# EAGLE board parcialinfo2(1) (EAGLE 7.6.0)

Size 73.58 x 63.39 mm. Coordinates in mm from the lower left corner, seen from the top.
Outline: 0,0 56.82,0 56.82,53.33 0,53.33 0,0
Copper layers (1*16): Top 0.035mm / dielectric 1.5mm / Bottom 0.035mm
Design rules "default": minimum track width 10mil, minimum drill 24mil, track to track 8mil, track to pad 8mil, pad to pad 8mil, via to via 8mil, smd to smd 8mil, copper to edge 40mil, drill to drill 8mil, minimum pad ring 10mil, minimum via ring 8mil, stop-mask expansion 4mil, vias tented up to drill 0mil, thermal gap 10mil

## Footprints (pad centres in the part's own frame; a part is rotated, then mirrored left to right if it is on the bottom)
LED5MM = drill 0.813 octagon: A -1.27,0; K 1.27,0
0207/10 = drill 0.813 octagon: 1 -5.08,0; 2 5.08,0
ARDUINO_UNO = drill 1.016 pad 1.88: 0 63.5,50.8; 1 60.96,50.8; 2 58.42,50.8; 3 55.88,50.8; 3.3V 35.56,2.54; 4 53.34,50.8; 5 50.8,50.8; 5V 38.1,2.54; 6 48.26,50.8; 7 45.72,50.8; 8 41.656,50.8; 9 39.116,50.8; 10 36.576,50.8; 11 34.036,50.8; 12 31.496,50.8; 13 28.956,50.8; A0 50.8,2.54; A1 53.34,2.54; A2 55.88,2.54; A3 58.42,2.54; A4 60.96,2.54; A5 63.5,2.54; AREF 23.876,50.8; GND 26.416,50.8; GND. 43.18,2.54; GND.. 40.64,2.54; I/OREF 30.48,2.54; N/C 27.94,2.54; RESET 33.02,2.54; SCL 18.796,50.8; SDA 21.336,50.8; VIN 45.72,2.54 | hole 3.2: 66.04,7.62; 66.04,35.56; 15.24,50.8; 13.97,2.54
DIL16 = drill 0.813 long: 1 -8.89,-3.81; 2 -6.35,-3.81; 3 -3.81,-3.81; 4 -1.27,-3.81; 5 1.27,-3.81; 6 3.81,-3.81; 7 6.35,-3.81; 8 8.89,-3.81; 9 8.89,3.81; 10 6.35,3.81; 11 3.81,3.81; 12 1.27,3.81; 13 -1.27,3.81; 14 -3.81,3.81; 15 -6.35,3.81; 16 -8.89,3.81

## Placement (x,y rotation side)
D5  [LED5MM]  5,124.38 0 top  (outside the outline)
D6  [LED5MM]  5,137.08 0 top  (outside the outline)
D7  [LED5MM]  5,149.78 0 top  (outside the outline)
D8  [LED5MM]  5,162.48 0 top  (outside the outline)
D9  [LED5MM]  5,175.18 0 top  (outside the outline)
D10  [LED5MM]  5,187.88 0 top  (outside the outline)
D11  [LED5MM]  5,200.58 0 top  (outside the outline)
D12  [LED5MM]  5,213.28 0 top  (outside the outline)
D13  [LED5MM]  5,225.98 0 top  (outside the outline)
D14  [LED5MM]  5,238.68 0 top  (outside the outline)
D15  [LED5MM]  5,251.38 0 top  (outside the outline)
D16  [LED5MM]  5,264.08 0 top  (outside the outline)
D17  [LED5MM]  5,276.78 0 top  (outside the outline)
D18  [LED5MM]  5,289.48 0 top  (outside the outline)
D19  [LED5MM]  5,302.18 0 top  (outside the outline)
D20  [LED5MM]  5,314.88 0 top  (outside the outline)
D21  [LED5MM]  5,327.58 0 top  (outside the outline)
D22  [LED5MM]  5,340.28 0 top  (outside the outline)
D23  [LED5MM]  5,352.98 0 top  (outside the outline)
D24  [LED5MM]  5,365.68 0 top  (outside the outline)
D25  [LED5MM]  5,378.38 0 top  (outside the outline)
D26  [LED5MM]  5,391.08 0 top  (outside the outline)
D27  [LED5MM]  5,403.78 0 top  (outside the outline)
D28  [LED5MM]  5,416.48 0 top  (outside the outline)
D29  [LED5MM]  5,429.18 0 top  (outside the outline)
D30  [LED5MM]  5,441.88 0 top  (outside the outline)
D31  [LED5MM]  5,454.58 0 top  (outside the outline)
D32  [LED5MM]  5,467.28 0 top  (outside the outline)
D33  [LED5MM]  5,479.98 0 top  (outside the outline)
D34  [LED5MM]  5,492.68 0 top  (outside the outline)
D35  [LED5MM]  5,505.38 0 top  (outside the outline)
D36  [LED5MM]  5,518.08 0 top  (outside the outline)
D37  [LED5MM]  5,530.78 0 top  (outside the outline)
D38  [LED5MM]  5,543.48 0 top  (outside the outline)
D39  [LED5MM]  5,556.18 0 top  (outside the outline)
D40  [LED5MM]  5,568.88 0 top  (outside the outline)
D41  [LED5MM]  5,581.58 0 top  (outside the outline)
D42  [LED5MM]  5,848.28 0 top  (outside the outline)
D43  [LED5MM]  5,594.28 0 top  (outside the outline)
D44  [LED5MM]  5,606.98 0 top  (outside the outline)
D45  [LED5MM]  5,619.68 0 top  (outside the outline)
D46  [LED5MM]  5,632.38 0 top  (outside the outline)
D47  [LED5MM]  5,645.08 0 top  (outside the outline)
D48  [LED5MM]  5,657.78 0 top  (outside the outline)
D49  [LED5MM]  5,670.48 0 top  (outside the outline)
D50  [LED5MM]  5,683.18 0 top  (outside the outline)
D51  [LED5MM]  5,695.88 0 top  (outside the outline)
D52  [LED5MM]  5,708.58 0 top  (outside the outline)
D53  [LED5MM]  5,721.28 0 top  (outside the outline)
D54  [LED5MM]  5,733.98 0 top  (outside the outline)
D55  [LED5MM]  5,746.68 0 top  (outside the outline)
D56  [LED5MM]  5,759.38 0 top  (outside the outline)
D57  [LED5MM]  5,772.08 0 top  (outside the outline)
D58  [LED5MM]  5,784.78 0 top  (outside the outline)
D59  [LED5MM]  5,797.48 0 top  (outside the outline)
D60  [LED5MM]  5,810.18 0 top  (outside the outline)
D61  [LED5MM]  5,822.88 0 top  (outside the outline)
D62  [LED5MM]  5,860.98 0 top  (outside the outline)
D63  [LED5MM]  5,873.68 0 top  (outside the outline)
D64  [LED5MM]  5,886.38 0 top  (outside the outline)
D65  [LED5MM]  5,835.58 0 top  (outside the outline)
D66  [LED5MM]  5,899.08 0 top  (outside the outline)
D67  [LED5MM]  5,911.78 0 top  (outside the outline)
D68  [LED5MM]  5,924.48 0 top  (outside the outline)
R1  560‎Ω  [0207/10]  5,937.18 0 top  (outside the outline)
R3  560‎Ω  [0207/10]  5,949.88 0 top  (outside the outline)
R4  560‎Ω  [0207/10]  5,962.58 0 top  (outside the outline)
R5  560‎Ω  [0207/10]  5,975.28 0 top  (outside the outline)
R6  560‎Ω  [0207/10]  5,987.98 0 top  (outside the outline)
R7  560‎Ω  [0207/10]  5,1000.68 0 top  (outside the outline)
R8  560‎Ω  [0207/10]  5,1013.38 0 top  (outside the outline)
R9  560‎Ω  [0207/10]  5,1026.08 0 top  (outside the outline)
R10  560‎Ω  [0207/10]  5,1038.78 0 top  (outside the outline)
R11  560‎Ω  [0207/10]  5,1051.48 0 top  (outside the outline)
R12  560‎Ω  [0207/10]  5,1064.18 0 top  (outside the outline)
R13  560‎Ω  [0207/10]  5,1076.88 0 top  (outside the outline)
R14  560‎Ω  [0207/10]  5,1089.58 0 top  (outside the outline)
R15  560‎Ω  [0207/10]  5,1102.28 0 top  (outside the outline)
R16  560‎Ω  [0207/10]  5,1114.98 0 top  (outside the outline)
R17  560‎Ω  [0207/10]  5,1127.68 0 top  (outside the outline)
R18  560‎Ω  [0207/10]  5,1140.38 0 top  (outside the outline)
R19  560‎Ω  [0207/10]  5,1153.08 0 top  (outside the outline)
R20  560‎Ω  [0207/10]  5,1165.78 0 top  (outside the outline)
R21  560‎Ω  [0207/10]  5,1178.48 0 top  (outside the outline)
R22  560‎Ω  [0207/10]  5,1191.18 0 top  (outside the outline)
R23  560‎Ω  [0207/10]  5,1203.88 0 top  (outside the outline)
R24  560‎Ω  [0207/10]  5,1216.58 0 top  (outside the outline)
R25  560‎Ω  [0207/10]  5,1229.28 0 top  (outside the outline)
R26  560‎Ω  [0207/10]  5,1241.98 0 top  (outside the outline)
R27  560‎Ω  [0207/10]  5,1254.68 0 top  (outside the outline)
R28  560‎Ω  [0207/10]  5,1267.38 0 top  (outside the outline)
R29  560‎Ω  [0207/10]  5,1280.08 0 top  (outside the outline)
R30  560‎Ω  [0207/10]  5,1292.78 0 top  (outside the outline)
R31  560‎Ω  [0207/10]  5,1305.48 0 top  (outside the outline)
R32  560‎Ω  [0207/10]  5,1318.18 0 top  (outside the outline)
R33  560‎Ω  [0207/10]  5,1330.88 0 top  (outside the outline)
R34  560‎Ω  [0207/10]  5,1343.58 0 top  (outside the outline)
R35  560‎Ω  [0207/10]  5,1356.28 0 top  (outside the outline)
R36  560‎Ω  [0207/10]  5,1368.98 0 top  (outside the outline)
R37  560‎Ω  [0207/10]  5,1381.68 0 top  (outside the outline)
R38  560‎Ω  [0207/10]  5,1394.38 0 top  (outside the outline)
R39  560‎Ω  [0207/10]  5,1407.08 0 top  (outside the outline)
R40  560‎Ω  [0207/10]  5,1419.78 0 top  (outside the outline)
R41  560‎Ω  [0207/10]  5,1432.48 0 top  (outside the outline)
R42  560‎Ω  [0207/10]  5,1445.18 0 top  (outside the outline)
R43  560‎Ω  [0207/10]  5,1457.88 0 top  (outside the outline)
R44  560‎Ω  [0207/10]  5,1470.58 0 top  (outside the outline)
R45  560‎Ω  [0207/10]  5,1483.28 0 top  (outside the outline)
R46  560‎Ω  [0207/10]  5,1495.98 0 top  (outside the outline)
R47  560‎Ω  [0207/10]  5,1508.68 0 top  (outside the outline)
R48  560‎Ω  [0207/10]  5,1521.38 0 top  (outside the outline)
R49  560‎Ω  [0207/10]  5,1534.08 0 top  (outside the outline)
R50  560‎Ω  [0207/10]  5,1546.78 0 top  (outside the outline)
R51  560‎Ω  [0207/10]  5,1559.48 0 top  (outside the outline)
R52  560‎Ω  [0207/10]  5,1572.18 0 top  (outside the outline)
R53  560‎Ω  [0207/10]  5,1584.88 0 top  (outside the outline)
R54  560‎Ω  [0207/10]  5,1597.58 0 top  (outside the outline)
R55  560‎Ω  [0207/10]  5,1610.28 0 top  (outside the outline)
R56  560‎Ω  [0207/10]  5,1622.98 0 top  (outside the outline)
R57  560‎Ω  [0207/10]  5,1635.68 0 top  (outside the outline)
R58  560‎Ω  [0207/10]  5,1648.38 0 top  (outside the outline)
R59  560‎Ω  [0207/10]  5,1661.08 0 top  (outside the outline)
R60  560‎Ω  [0207/10]  5,1673.78 0 top  (outside the outline)
R61  560‎Ω  [0207/10]  5,1686.48 0 top  (outside the outline)
R62  560‎Ω  [0207/10]  5,1699.18 0 top  (outside the outline)
R63  560‎Ω  [0207/10]  5,1711.88 0 top  (outside the outline)
R64  560‎Ω  [0207/10]  5,1724.58 0 top  (outside the outline)
R65  560‎Ω  [0207/10]  5,1737.28 0 top  (outside the outline)
U1  [ARDUINO_UNO]  5,10.08 0 top
U2  [DIL16]  5,22.78 0 top
U3  [DIL16]  5,35.48 0 top
U4  [DIL16]  5,48.18 0 top
U5  [DIL16]  5,60.88 0 top
U6  [DIL16]  5,73.58 0 top  (outside the outline)
U7  [DIL16]  5,86.28 0 top  (outside the outline)
U8  [DIL16]  5,98.98 0 top  (outside the outline)
U9  [DIL16]  5,111.68 0 top  (outside the outline)

## Library data of the parts
D5-D68 R1 R3-R65 U1-U9 = AUTODESK_CIRCUITS_BREADBOARD

## Nets
N$1: R8.1 U2.1
N$2: R5.1 U2.4
N$3: R3.1 U2.6
N$4: R1.1 U2.7
N$5: R4.1 U2.5
N$6: U1.2 U2.14
N$7: R58.2 U2.15
N$8: R6.1 U2.3
N$9: U2.9 U3.14
N$10: R15.1 U3.1
N$11: R12.1 U3.4
N$12: R10.1 U3.6
N$13: R9.1 U3.7
N$14: R14.1 U3.2
N$15: R11.1 U3.5
N$16: R59.2 U3.15
N$17: R13.1 U3.3
N$18: U3.9 U4.14
N$19: R22.1 U4.1
N$20: R19.1 U4.4
N$21: R18.1 U4.6
N$22: R16.1 U4.7
N$23: R21.1 U4.2
N$24: R17.1 U4.5
N$25: R60.2 U4.15
N$26: U4.9 U5.14
N$27: R29.1 U5.1
N$28: R26.1 U5.4
N$29: R24.1 U5.6
N$30: R23.1 U5.7
N$31: R28.1 U5.2
N$32: R25.1 U5.5
N$33: R61.2 U5.15
N$34: R27.1 U5.3
N$35: U5.9 U6.14
N$36: R36.1 U6.1
N$37: R34.1 U6.4
N$38: R31.1 U6.6
N$39: R30.1 U6.7
N$40: R35.1 U6.2
N$41: R32.1 U6.5
N$42: R33.1 U6.3
N$43: U6.9 U7.14
N$44: R37.1 U7.1
N$45: R41.1 U7.4
N$46: R42.1 U7.6
N$47: R43.1 U7.7
N$48: R38.1 U7.2
N$49: R40.1 U7.5
N$50: R63.2 U7.15
N$51: R39.1 U7.3
N$52: U7.9 U8.14
N$53: R51.1 U9.1
N$54: R53.1 U9.4
N$55: R56.1 U9.6
N$56: R57.1 U9.7
N$57: R52.1 U9.2
N$58: U1.3 U2.12 U3.12 U4.12 U5.12 U6.12 U7.12 U8.12 U9.12
N$59: R55.1 U9.5
N$60: R65.2 U9.15
N$61: R54.1 U9.3
N$62: U9.9
N$63: U1.4 U2.11 U3.11 U4.11 U5.11 U6.11 U7.11 U8.11 U9.11
N$64: R44.1 U8.1
N$65: R46.1 U8.4
N$66: R48.1 U8.6
N$67: R49.1 U8.7
N$68: R45.1 U8.2
N$69: R47.1 U8.5
N$70: R64.2 U8.15
N$71: R50.1 U8.3
N$72: U8.9 U9.14
N$73: R62.2 U6.15
N$74: U1.5V U2.10 U2.16 U3.10 U3.16 U4.10 U4.16 U5.10 U5.16 U6.10 U6.16 U7.10 U7.16 U8.10 U8.16 U9.10 U9.16
N$75: D20.A R58.1
N$76: D18.A R7.2
N$77: D17.A R6.2
N$78: D16.A R5.2
N$79: D15.A R4.2
N$80: D14.A R3.2
N$81: D13.A R1.2
N$82: D11.A R15.2
N$83: D10.A R14.2
N$84: D9.A R13.2
N$85: D8.A R12.2
N$86: D7.A R11.2
N$87: D6.A R10.2
N$88: D5.A R9.2
N$89: D25.A R20.2
N$90: D26.A R21.2
N$91: D27.A R22.2
N$92: D24.A R19.2
N$93: D23.A R17.2
N$94: D22.A R18.2
N$95: D21.A R16.2
N$96: R7.1 U2.2
N$97: D12.A R59.1
N$98: D28.A R60.1
N$99: D35.A R29.2
N$100: D34.A R28.2
N$101: D33.A R27.2
N$102: D32.A R26.2
N$103: D31.A R25.2
N$104: D30.A R24.2
N$105: D29.A R23.2
N$106: D36.A R61.1
N$107: D44.A R62.1
N$108: D52.A R63.1
N$109: D60.A R64.1
N$110: D68.A R65.1
N$111: D43.A R36.2
N$112: D42.A R35.2
N$113: D41.A R33.2
N$114: D40.A R34.2
N$115: D39.A R32.2
N$116: D38.A R31.2
N$117: D37.A R30.2
N$118: D51.A R37.2
N$119: D50.A R38.2
N$120: D49.A R39.2
N$121: D48.A R41.2
N$122: D47.A R40.2
N$123: D46.A R42.2
N$124: D45.A R43.2
N$125: D59.A R44.2
N$126: D58.A R45.2
N$127: D57.A R50.2
N$128: D56.A R46.2
N$129: D55.A R47.2
N$130: D54.A R48.2
N$131: D53.A R49.2
N$132: D67.A R51.2
N$133: D66.A R52.2
N$134: D65.A R54.2
N$135: D64.A R53.2
N$136: D63.A R55.2
N$137: D62.A R56.2
N$138: D61.A R57.2
N$139: R20.1 U4.3
N$140: D19.A R8.2
N$141: D5.K D6.K D7.K D8.K D9.K D10.K D11.K D12.K D13.K D14.K D15.K D16.K D17.K D18.K D19.K D20.K D21.K D22.K D23.K D24.K D25.K D26.K D27.K D28.K D29.K D30.K D31.K D32.K D33.K D34.K D35.K D36.K D37.K D38.K D39.K D40.K D41.K D42.K D43.K D44.K D45.K D46.K D47.K D48.K D49.K D50.K D51.K D52.K D53.K D54.K D55.K D56.K D57.K D58.K D59.K D60.K D61.K D62.K D63.K D64.K D65.K D66.K D67.K D68.K U1.GND.. U2.8 U2.13 U3.8 U3.13 U4.8 U4.13 U5.8 U5.13 U6.8 U6.13 U7.8 U7.13 U8.8 U8.13 U9.8 U9.13

## Tracks (layer width: path | path; a pad name or v marks a point on that pad's centre or on a via)
N$1  (1 unrouted)
N$2  (1 unrouted)
N$3  (1 unrouted)
N$4  (1 unrouted)
N$5  (1 unrouted)
N$6  (1 unrouted)
N$7  (1 unrouted)
N$8  (1 unrouted)
N$9  (1 unrouted)
N$10  (1 unrouted)
N$11  (1 unrouted)
N$12  (1 unrouted)
N$13  (1 unrouted)
N$14  (1 unrouted)
N$15  (1 unrouted)
N$16  (1 unrouted)
N$17  (1 unrouted)
N$18  (1 unrouted)
N$19  (1 unrouted)
N$20  (1 unrouted)
N$21  (1 unrouted)
N$22  (1 unrouted)
N$23  (1 unrouted)
N$24  (1 unrouted)
N$25  (1 unrouted)
N$26  (1 unrouted)
N$27  (1 unrouted)
N$28  (1 unrouted)
N$29  (1 unrouted)
N$30  (1 unrouted)
N$31  (1 unrouted)
N$32  (1 unrouted)
N$33  (1 unrouted)
N$34  (1 unrouted)
N$35  (1 unrouted)
N$36  (1 unrouted)
N$37  (1 unrouted)
N$38  (1 unrouted)
N$39  (1 unrouted)
N$40  (1 unrouted)
N$41  (1 unrouted)
N$42  (1 unrouted)
N$43  (1 unrouted)
N$44  (1 unrouted)
N$45  (1 unrouted)
N$46  (1 unrouted)
N$47  (1 unrouted)
N$48  (1 unrouted)
N$49  (1 unrouted)
N$50  (1 unrouted)
N$51  (1 unrouted)
N$52  (1 unrouted)
N$53  (1 unrouted)
N$54  (1 unrouted)
N$55  (1 unrouted)
N$56  (1 unrouted)
N$57  (1 unrouted)
N$58  (8 unrouted)
N$59  (1 unrouted)
N$60  (1 unrouted)
N$61  (1 unrouted)
N$63  (8 unrouted)
N$64  (1 unrouted)
N$65  (1 unrouted)
N$66  (1 unrouted)
N$67  (1 unrouted)
N$68  (1 unrouted)
N$69  (1 unrouted)
N$70  (1 unrouted)
N$71  (1 unrouted)
N$72  (1 unrouted)
N$73  (1 unrouted)
N$74  (16 unrouted)
N$75  (1 unrouted)
N$76  (1 unrouted)
N$77  (1 unrouted)
N$78  (1 unrouted)
N$79  (1 unrouted)
N$80  (1 unrouted)
N$81  (1 unrouted)
N$82  (1 unrouted)
N$83  (1 unrouted)
N$84  (1 unrouted)
N$85  (1 unrouted)
N$86  (1 unrouted)
N$87  (1 unrouted)
N$88  (1 unrouted)
N$89  (1 unrouted)
N$90  (1 unrouted)
N$91  (1 unrouted)
N$92  (1 unrouted)
N$93  (1 unrouted)
N$94  (1 unrouted)
N$95  (1 unrouted)
N$96  (1 unrouted)
N$97  (1 unrouted)
N$98  (1 unrouted)
N$99  (1 unrouted)
N$100  (1 unrouted)
N$101  (1 unrouted)
N$102  (1 unrouted)
N$103  (1 unrouted)
N$104  (1 unrouted)
N$105  (1 unrouted)
N$106  (1 unrouted)
N$107  (1 unrouted)
N$108  (1 unrouted)
N$109  (1 unrouted)
N$110  (1 unrouted)
N$111  (1 unrouted)
N$112  (1 unrouted)
N$113  (1 unrouted)
N$114  (1 unrouted)
N$115  (1 unrouted)
N$116  (1 unrouted)
N$117  (1 unrouted)
N$118  (1 unrouted)
N$119  (1 unrouted)
N$120  (1 unrouted)
N$121  (1 unrouted)
N$122  (1 unrouted)
N$123  (1 unrouted)
N$124  (1 unrouted)
N$125  (1 unrouted)
N$126  (1 unrouted)
N$127  (1 unrouted)
N$128  (1 unrouted)
N$129  (1 unrouted)
N$130  (1 unrouted)
N$131  (1 unrouted)
N$132  (1 unrouted)
N$133  (1 unrouted)
N$134  (1 unrouted)
N$135  (1 unrouted)
N$136  (1 unrouted)
N$137  (1 unrouted)
N$138  (1 unrouted)
N$139  (1 unrouted)
N$140  (1 unrouted)
N$141  (80 unrouted)